# Altium PCB buck.PcbDoc
Units mm, origin at the board's own origin, x right, y up, seen from the top; angles counter-clockwise.
Board outline 152.4 x 101.6 mm, 2 copper layers (Top Layer, Bottom Layer); 18 components, 10 nets, 42 pads, 4 vias.
Unrouted connection lines stored in the file: 1.
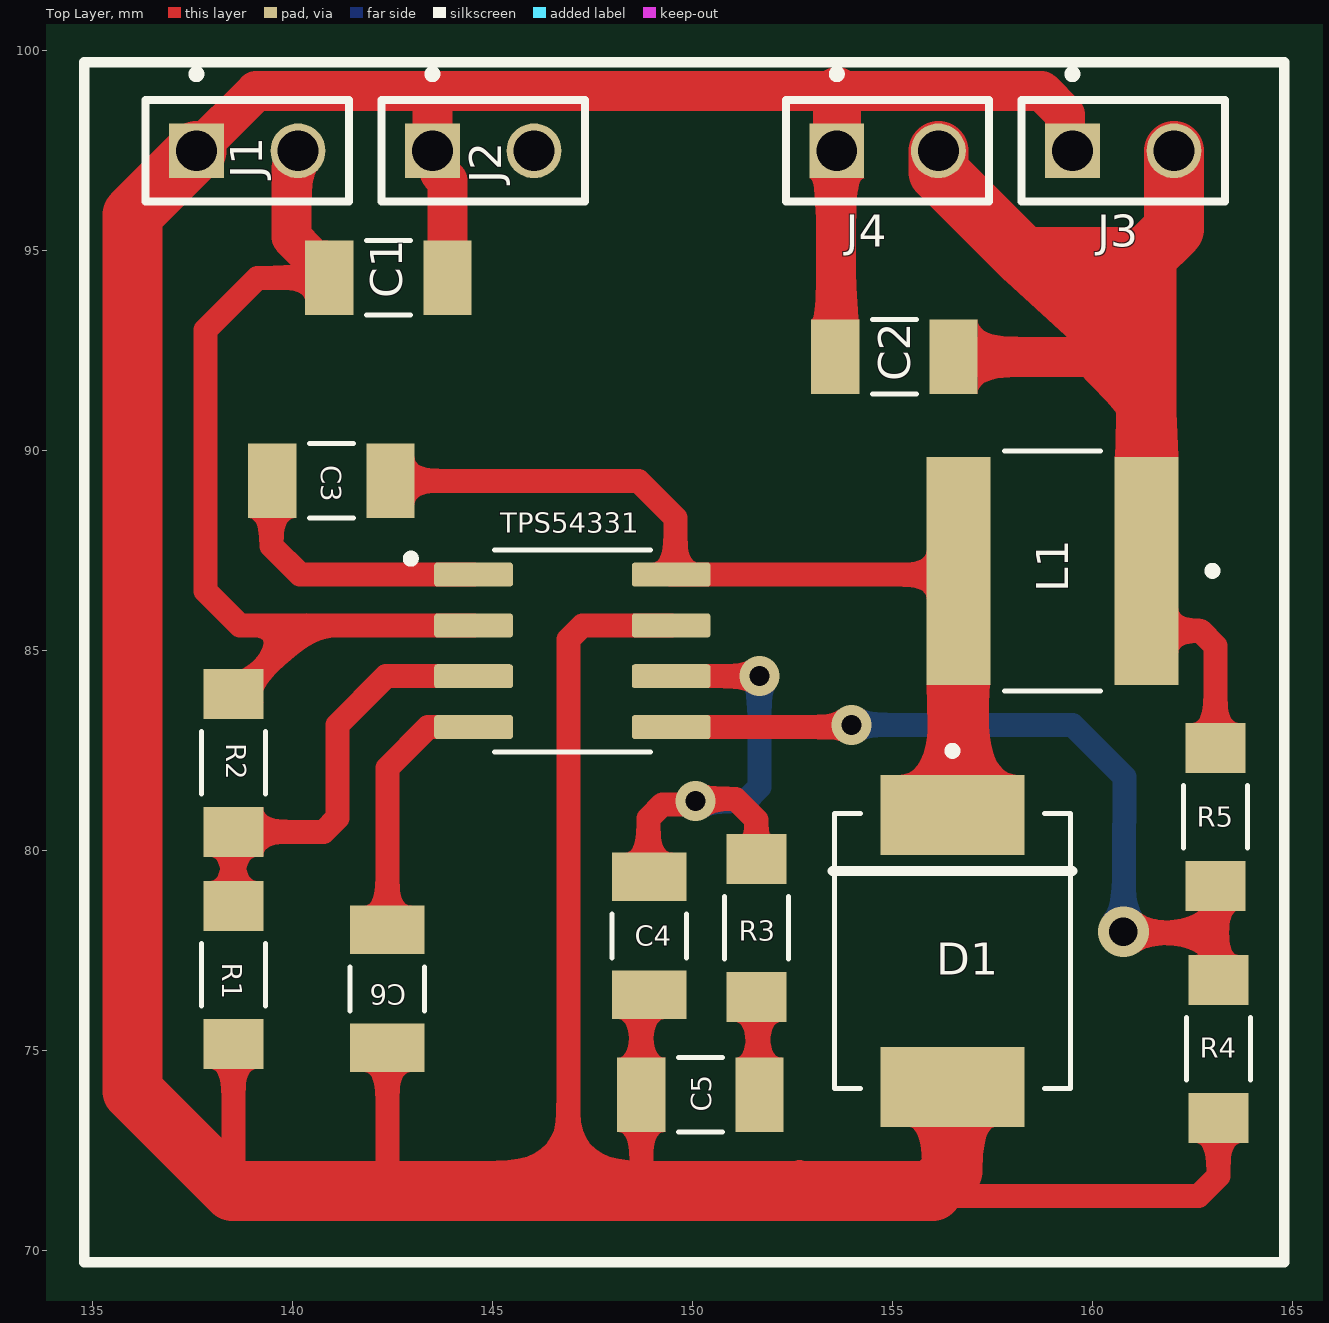
[diagram p0: Top Layer view]
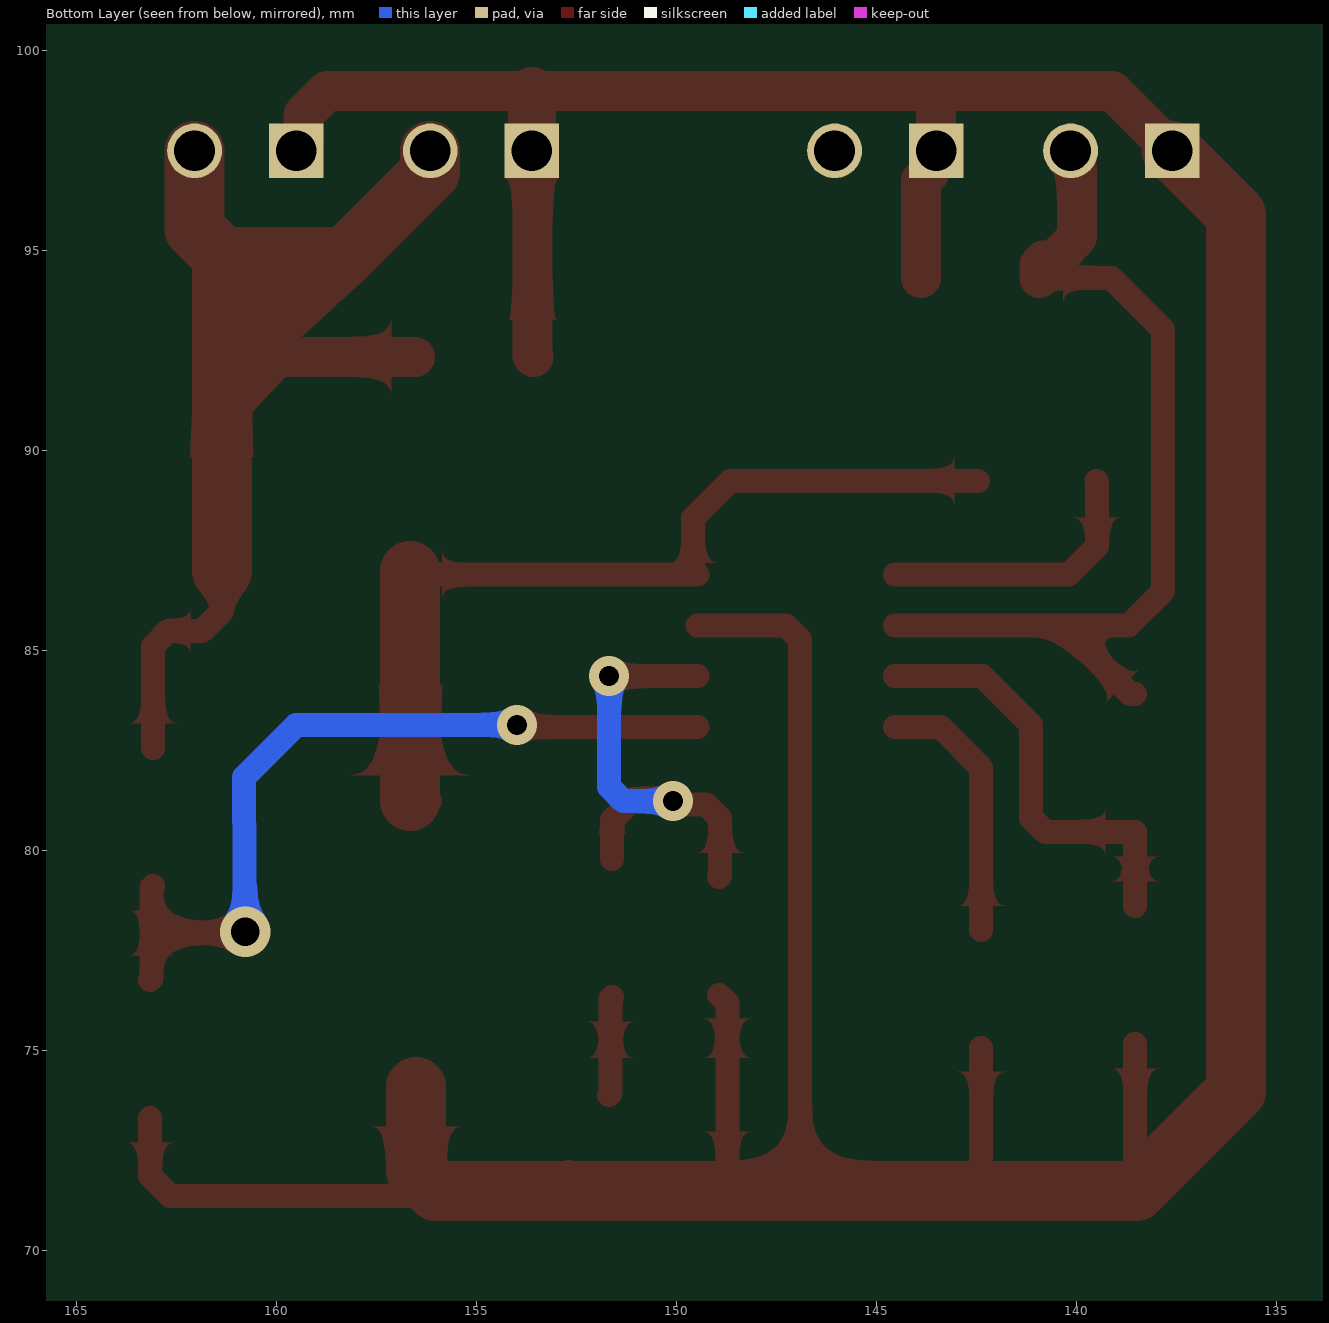
[diagram p1: Bottom Layer view, seen from below]

## Layer stack, top to bottom
Top Solder: solder mask 0.0102, Solder Resist, Dk 3.5
Top Layer: signal copper 0.0356
Dielectric 1: dielectric 0.32, FR-4, Dk 4.8
Bottom Layer: signal copper 0.0356
Bottom Solder: solder mask 0.0102, Solder Resist, Dk 3.5

## Board outline
25.4,25.4 177.8,25.4 177.8,127 25.4,127

## Design rules (kind name [scope] priority, off if disabled: settings)
Clearance [All] p1: gap=0.1 ignorepadtopadclearanceinfootprint=FALSE
PolygonConnect [All] p1: connectstyle=Relief reliefconductorwidth=0.254 reliefentries=4 polygonreliefangle="90 Angle" airgapwidth=0.254
RoutingVias [All] p1: holewidth=0.711 width=1.27 viastyle="Through Hole" minholewidth=0.2 minwidth=1 maxholewidth=0.711 maxwidth=2
SolderMaskExpansion [All] p1: expansion=0.102 istentingtop=FALSE
UnRoutedNet [All] p1: checkbadconnections=TRUE
Width [All] p1: maxlimit=2 minlimit=0.254 preferedwidth=0.6
29 further rules are at their usual default settings.

## Components (designator, comment, footprint, x,y, rotation, side; value= is the part's Value field where it differs from the comment)
C1 "1206" CAPC3216X170N 142.4,94.325 r0 top
C2 "1206" CAPC3216X170N 155.05,92.35 r180 top
C3 "100nF" CAPC3216X170N 140.975,89.25 r0 top
C4 "1206" CAPC3216X170N 148.925,77.875 r270 top
C5 "1206" CAPC3216X170N 150.2,73.9 r180 top
C6 "1206" CAPC3216X170N 142.375,76.55 r270 top
D1 "SS34" DIO_SS34 156.5,77.5 r270 top
J1 "TSW-101-23-S-D-LL" SAMTEC_TSW-101-23-S-D-LL 137.6,97.5 r270 top
J2 "TSW-101-23-S-D-LL" SAMTEC_TSW-101-23-S-D-LL 143.5,97.5 r270 top
J3 "TSW-101-23-S-D-LL" SAMTEC_TSW-101-23-S-D-LL 159.5,97.5 r270 top
J4 "TSW-101-23-S-D-LL" SAMTEC_TSW-101-23-S-D-LL 153.61,97.5 r270 top
L1 "" IND_1255AY-100M=P3 159,87 r180 top
R1 "ERJU08J274V" RES_ERJU08J274V 138.525,76.9 r90 top
R2 "ERJU08J274V" RES_ERJU08J274V 138.525,82.2 r270 top
R3 "ERJU08J274V" RES_ERJU08J274V 151.6,78.075 r270 top
R4 "ERJU08J274V" RES_ERJU08J274V 163.15,75.05 r90 top
R5 "ERJU08J274V" RES_ERJU08J274V 163.075,80.85 r90 top
TPS54331 "TPS54331DG4" SOIC127P599X175-8N 147,85 r0 top (schematic designator U1)

## Footprints (in the part's own frame and the unit in brackets; to place one, negate y for a bottom-side part, rotate by r counter-clockwise, add the part's x,y. Pads: shape width x height; smd on the part's side, far side on the other; paste and mask are expansions set on the pad)
CAPC3216X170N [mm]
  rect 1.21x1.86 smd: 1(-1.477,0) 2(1.477,0)
  silkscreen extent -0.55,-0.93 0.55,0.93
DIO_SS34 [mm]
  rect 2x3.6 smd: A(3.4,0) C(-3.4,0)
  silkscreen extent -5.1,-2.95 3.44,2.95, body extent -3.98,-2.95 3.98,2.95, height 2.65
IND_1255AY-100M=P3 [mm]
  rect 1.6x5.7 smd: 1(-2.35,0) 2(2.35,0)
  silkscreen extent -4.1,-3 1.2,3
RES_ERJU08J274V [mm]
  rect 1.25x1.5 smd: 1(-1.725,0) 2(1.725,0)
  silkscreen extent -0.78,-0.8 0.78,0.8, body extent -1.6,-0.8 1.6,0.8, height 0.6
SAMTEC_TSW-101-23-S-D-LL [mm]
  rect 1.37x1.37 hole 1.02: 01(0,0)
  round 1.37 hole 1.02: 02(0,2.54)
  silkscreen extent -2.02,-1.27 1.27,3.81
SOIC127P599X175-8N [mm]
  rrect25% 1.97x0.6 smd: 1(-2.47,1.905) 2(-2.47,0.635) 3(-2.47,-0.635) 4(-2.47,-1.905) 5(2.47,-1.905) 6(2.47,-0.635) 7(2.47,0.635) 8(2.47,1.905)
  silkscreen extent -4.14,-2.52 1.95,2.52, body extent -3,-2.45 3,2.45, height 1.75

## Part data
C1: library part VJ1206A270KXCAP, "10uF 25v", Package=None, Availability=Unavailable, MP=VJ1206A270KXCAP, Price=None
C2: library part VJ1206A270KXCAP, "10uF", Package=None, Availability=Unavailable, MP=VJ1206A270KXCAP, Price=None
C3: library part VJ1206A270KXCAP, "100nf", Package=None, Availability=Unavailable, MP=VJ1206A270KXCAP, Price=None
C4: library part VJ1206A270KXCAP, "10pF", Package=None, Availability=Unavailable, MP=VJ1206A270KXCAP, Price=None
C5: library part VJ1206A270KXCAP, "2nF", Package=None, Availability=Unavailable, MP=VJ1206A270KXCAP, Price=None
C6: library part VJ1206A270KXCAP, "8.2", Package=None, Availability=Unavailable, MP=VJ1206A270KXCAP, Price=None
D1: "550mv", Package="DO-214AB-2 Taiwan Semiconductor", Check_prices=https://www.snapeda.com/parts/SS34/Taiwan+Semiconductor/view-part/?ref=eda, MF="Taiwan Semiconductor", MP=SS34, SnapEDA_Link=https://www.snapeda.com/parts/SS34/Taiwan+Semiconductor/view-part/?ref=snap
J1 J2 J3 J4: Package=None, Availability=Unavailable, MP=TSW-101-23-S-D-LL, Price=None
L1: library part 1255AY-100M=P3, "18uH", Package=NONSTANDARD, Digi-Key_Part_Number=490-10800-1-ND, Digi-Key_Purchase_URL=https://www.digikey.com/product-detail/en/murata-electronics/1255AY-100M=P3/490-10800-1-ND/5271542?utm_source=snapeda&utm_medium=aggregator&utm_campaign=symbol, MF=Murata, MP=1255AY-100M=P3, SnapEDA_Link=https://www.snapeda.com/parts/1255AY-100M=P3/Murata/view-part/583912/?ref=snap
R1 R2 R5: "1206 anti-sulfurated resistor 1206 Anti-Sulfurated", Package="3216-2 Panasonic", Check_prices=https://www.snapeda.com/parts/ERJ-U08J274V/Panasonic/view-part/?ref=eda, MF=Panasonic, MP=ERJ-U08J274V, SnapEDA_Link=https://www.snapeda.com/parts/ERJ-U08J274V/Panasonic/view-part/?ref=snap
R3: Package="3216-2 Panasonic", Check_prices=https://www.snapeda.com/parts/ERJ-U08J274V/Panasonic/view-part/?ref=eda, MF=Panasonic, MP=ERJ-U08J274V, SnapEDA_Link=https://www.snapeda.com/parts/ERJ-U08J274V/Panasonic/view-part/?ref=snap
R4: "887", Package="3216-2 Panasonic", Check_prices=https://www.snapeda.com/parts/ERJ-U08J274V/Panasonic/view-part/?ref=eda, MF=Panasonic, MP=ERJ-U08J274V, SnapEDA_Link=https://www.snapeda.com/parts/ERJ-U08J274V/Panasonic/view-part/?ref=snap
TPS54331: "3.5V to 28V Input, 3A, 570kHz Step-Down Converter with Eco-mode 8-SOIC -40 to 150", Package="SOIC-8 Texas Instruments", Check_prices=https://www.snapeda.com/parts/TPS54331DG4/Texas+Instruments/view-part/?ref=eda, MF="Texas Instruments", MP=TPS54331DG4, SnapEDA_Link=https://www.snapeda.com/parts/TPS54331DG4/Texas+Instruments/view-part/?ref=snap

## Via types
v1: diameter 1, hole 0.5, Top Layer to Bottom Layer, 3 vias
v2: diameter 1.27, hole 0.711, Top Layer to Bottom Layer, 1 vias

## Nets (pads, with @x,y where several pads share a name; then routed paths per layer and width w, separated by ;. In a path a pad name is that pad's centre, name@x,y a point inside that pad or via, vN(x,y) a via of type N, cw(c..) or ccw(c..) an arc to the next point about the centre after c; other vN are vias at no path point)
GND: C1.2 C2.2 C4.2 C5.2 C6.2 D1.A J1.01 J2.01 J3.01 J4.01 R1.1 R4.1 TPS54331.7 | length 123.3
  Top Layer w0.6: 138.5,71.5 138.525,71.525 R1.1 ; 142.25,71.5 142.375,71.625 C6.2 ; 146.9,71.5 146.9,85.284 147.251,85.635 TPS54331.7 ; 148.675,71.5 148.723,71.548 C5.2 148.723,76.196 C4.2 ; 152.2,71.5 152.675,71.975 ; 153.6,99 153.61,98.99 ; 154.1,71.5 154.225,71.375 162.65,71.375 163.15,71.875 R4.1
  Top Layer w1: J1.01 139.09,98.99 143.5,98.99 ; C1.2 143.877,96.753 143.685,96.945 143.685,97.315 J2.01 143.5,98.99 ; C2.2 153.591,92.368 153.591,97.482 J4.01 ; 153.6,99 158.729,99 159.315,98.414 159.315,97.685 J3.01 ; 153.61,98.99 143.5,98.99
  Top Layer w1.2: J4.01 153.61,98.99
  Top Layer w1.5: J1.01 136,95.9 136,74 138.5,71.5 142.25,71.5 146.9,71.5 148.675,71.5 152.2,71.5 154.1,71.5 156,71.5 156.5,72 D1.A
NetC2_1: C2.1 J3.02 J4.02 L1.1 R5.2 | length 28.4
  Top Layer w0.6: L1.1 161.35,86.001 161.85,85.501 162.699,85.501 163.075,85.125 R5.2
  Top Layer w1: C2.1 159.975,92.35 161.35,90.975
  Top Layer w1.5: J4.02 156.15,96.975 158.275,94.85 161.35,94.85 ; L1.1 161.35,90.975 161.35,94.85 ; J3.02 162.04,95.54 161.35,94.85
NetC3_1: C3.1 TPS54331.1 | length 7
  Top Layer w0.6: C3.1 139.475,89.227 139.475,87.625 140.195,86.905 TPS54331.1
NetC3_2: C3.2 D1.C L1.2 TPS54331.8 | length 22
  Top Layer w0.6: C3.2 148.65,89.25 149.575,88.325 TPS54331.8@149.575,86.905 ; TPS54331.8 TPS54331.8@149.575,86.905 ; D1.C@156.15,81.25 D1.C ; L1.2@156.323,86.905 TPS54331.8@149.575,86.905
  Top Layer w1.5: D1.C@156.65,81.25 L1.2
NetC4_1: C4.1 R3.1 TPS54331.6 | length 12.3
  Top Layer w0.6: C4.1 148.9,79.377 148.9,80.812 149.251,81.163 149.998,81.163 v1(150.075,81.24) 150.135,81.3 151.075,81.3 151.6,80.775 R3.1 ; TPS54331.6 v1(151.675,84.365)
  Bottom Layer w0.6: v1(150.075,81.24) 151.324,81.24 151.675,81.591 v1(151.675,84.365)
NetC5_1: C5.1 R3.2 | length 2.5
  Top Layer w0.6: R3.2 151.638,76.312 151.638,73.939 C5.1
NetC6_1: C6.1 TPS54331.4 | length 6.6
  Top Layer w0.6: C6.1 142.375,82.075 143.395,83.095 TPS54331.4
NetR1_2: R1.2 R2.2 TPS54331.3 | length 10.8
  Top Layer w0.6: R1.2 R2.2 140.774,80.475 141.125,80.826 141.125,83.15 142.34,84.365 TPS54331.3
NetR4_2: R4.2 R5.1 TPS54331.5 | length 20.5
  Top Layer w0.6: TPS54331.5 153.92,83.095 v1(153.975,83.15) ; v2(160.775,77.975) 160.8,77.95 163.112,77.95 ; R5.1 163.112,79.088 163.112,77.95 ; R4.2 163.112,76.813 163.112,77.95
  Bottom Layer w0.6: v1(153.975,83.15) 159.5,83.15 160.801,81.849 160.801,81.596 v2(160.775,77.975)
VCC: C1.1 J1.02 J2.02 R2.1 TPS54331.2 | length 23.6
  Top Layer w0.6: R2.1 138.65,83.925 140.36,85.635 ; C1.1 139.125,94.325 137.825,93.025 137.825,86.5 138.69,85.635 140.36,85.635 ; TPS54331.2 140.36,85.635
  Top Layer w1: J1.02 140.069,97.429 140.069,97.168 139.975,97.073 139.975,95.341 140.561,94.755 140.818,94.755 140.923,94.65 C1.1

## Other copper
Top Layer:
  region net NetC2_1: 161.225,91.152 161.225,94.35 157.725,94.35

## Silkscreen, mask and mechanical layers (free items; w line width, h text height)
Top Overlay:
  lines w0.254: 153.5,79.5 159.5,79.5 ; 134.798,69.713 164.798,69.713 164.798,99.713 134.798,99.713 134.798,69.713